# EAGLE board aqc-rev3-rear-panel (EAGLE 9.0.1)
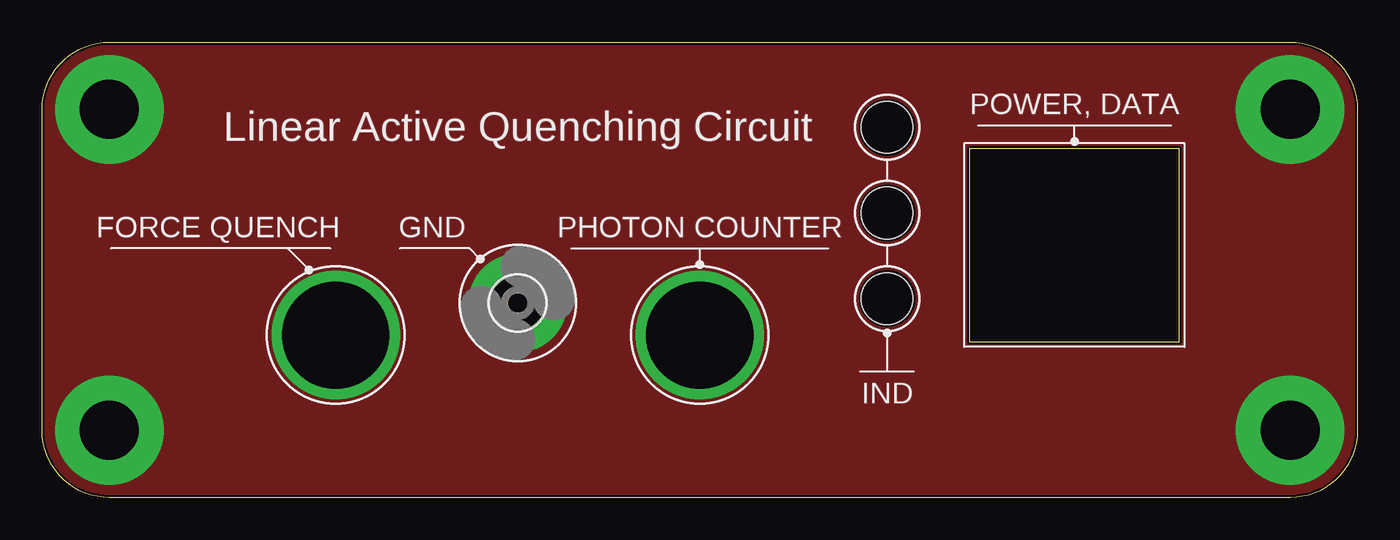
[diagram p0: board, top side]
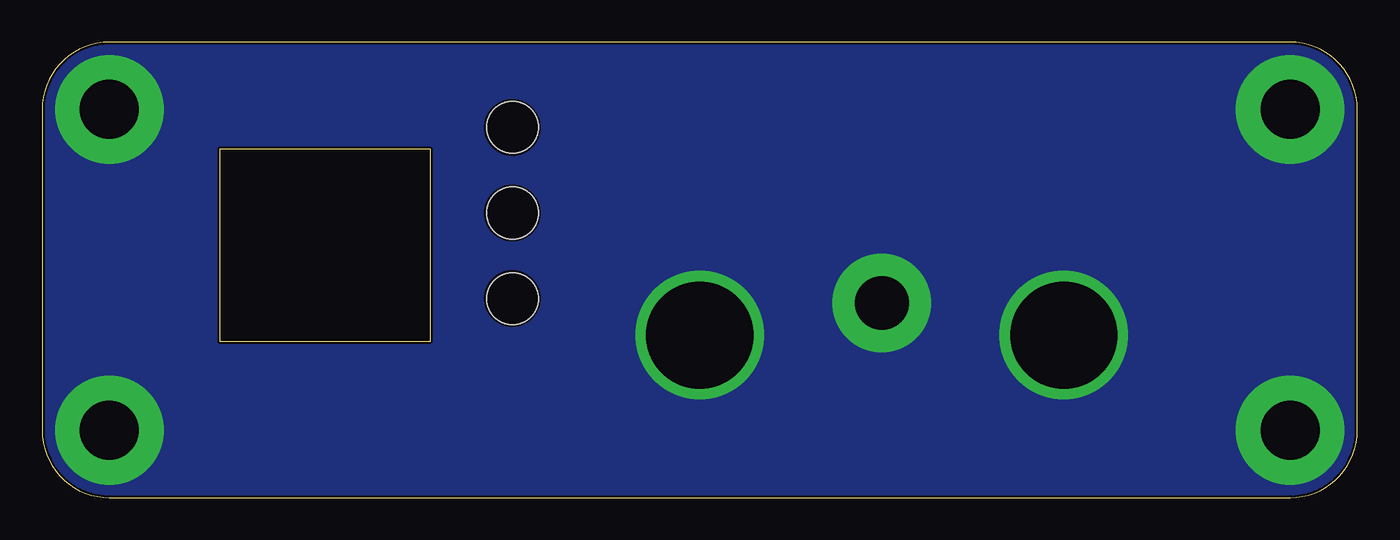
[diagram p1: board, bottom side, seen from below]

Size 78 x 27 mm. Coordinates in mm from the lower left corner, seen from the top.
Outline: 55,20.68 55,9.25 67.45,9.25 67.45,20.68 55,20.68
Copper layers (1*16): Top 0.035mm / dielectric 1.5mm / Bottom 0.035mm
Design rules "default *": minimum track width 6mil, minimum drill 0.35mm, track to track 6mil, track to pad 6mil, pad to pad 6mil, via to via 6mil, smd to smd 6mil, copper to edge 6mil, drill to drill 6mil, minimum pad ring 10mil, minimum via ring 8mil, stop-mask expansion 4mil, vias tented up to drill 0mil, thermal gap 10mil
Holes 3.05 mm at 50.11,11.79 50.11,16.87 50.11,21.95

## Footprints (pad centres in the part's own frame; a part is rotated, then mirrored left to right if it is on the bottom)
3,2-PAD = drill 3.2 pad 5.842: B3,2 0,0
HAMMOND_1455J1201_SIDE_PANEL = drill 3.5 pad 6.452: 1 -35.01,-9.51; 2 35.01,-9.51; 3 35.01,9.51; 4 -35.01,9.51

## Placement (x,y rotation side)
H1  MOUNT-PAD-ROUND3.2  [3,2-PAD]  28.2,11.54 0 top
X1  HAMMOND_1455J1201_SIDE_PANEL  [HAMMOND_1455J1201_SIDE_PANEL]  39,13.5 0 top

## Library data of the parts
H1 = holes
X1 = meng

## Nets
GND: H1.B3,2 X1.1 X1.2 X1.3 X1.4

## Tracks (layer width: path | path; a pad name or v marks a point on that pad's centre or on a via)
GND  (via drill 6.35 pad 7.62)
  other vias: 17.41,9.63 39,9.63
  pour Bottom (no thermals): -0.29,27.47 -0.29,-0.47 78.29,-0.47 78.29,27.47
  pour Top (no thermals): -0.29,27.47 -0.29,-0.47 78.29,-0.47 78.29,27.47

## Text on the board
tNames: POWER, DATA | Linear Active Quenching Circuit | FORCE QUENCH | GND | PHOTON COUNTER | IND